# EAGLE board versao 1.0 (EAGLE 5.01)
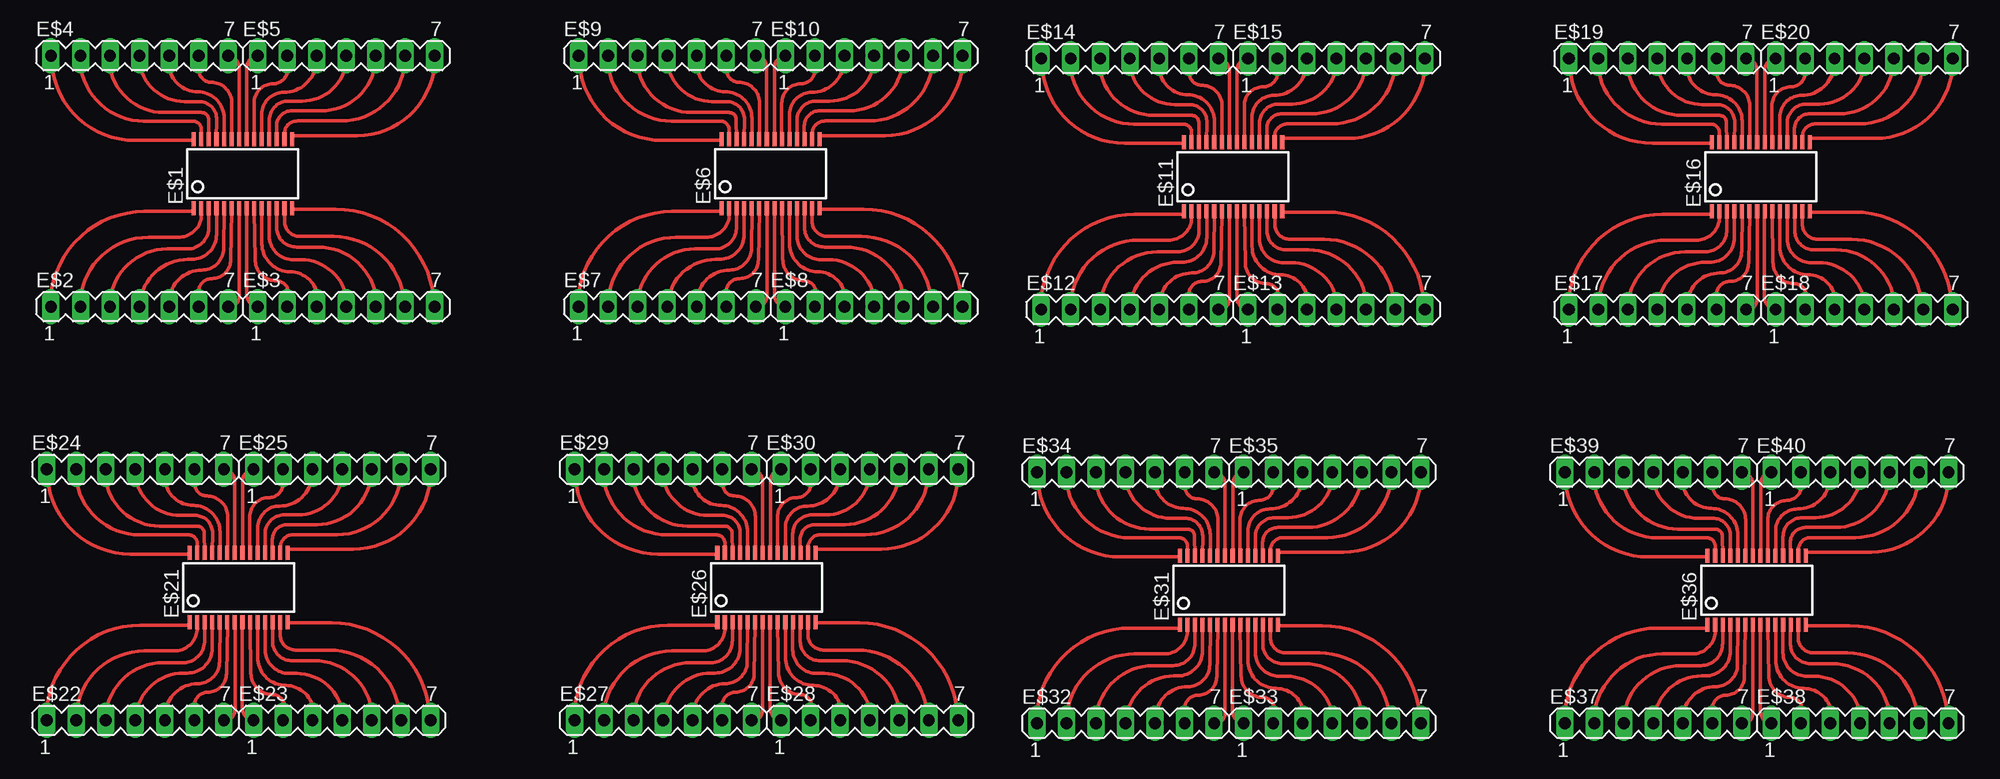
[diagram p0: board, top side]

No outline drawn. Coordinates in mm, seen from the top.
Copper layers (1*16): Top 0.035mm / dielectric 1.5mm / Bottom 0.035mm
Design rules "default": minimum track width 10mil, minimum drill 24mil, track to track 8mil, track to pad 8mil, pad to pad 8mil, via to via 8mil, smd to smd 8mil, copper to edge 40mil, drill to drill 8mil, minimum pad ring 10mil, minimum via ring 8mil, stop-mask expansion 4mil, vias tented up to drill 0mil, thermal gap 10mil

## Footprints (pad centres in the part's own frame; a part is rotated, then mirrored left to right if it is on the bottom)
P-TSSOP28-1 = smd 0.35 x 1.2: 1 -4.225,-2.975; 2 -3.575,-2.975; 3 -2.925,-2.975; 4 -2.275,-2.975; 5 -1.625,-2.975; 6 -0.975,-2.975; 7 -0.325,-2.975; 8 0.325,-2.975; 9 0.975,-2.975; 10 1.625,-2.975; 11 2.275,-2.975; 12 2.925,-2.975; 13 3.575,-2.975; 14 4.225,-2.975; 15 4.225,2.975; 16 3.575,2.975; 17 2.925,2.975; 18 2.275,2.975; 19 1.625,2.975; 20 0.975,2.975; 21 0.325,2.975; 22 -0.325,2.975; 23 -0.975,2.975; 24 -1.625,2.975; 25 -2.275,2.975; 26 -2.925,2.975; 27 -3.575,2.975; 28 -4.225,2.975
MA07-1 = drill 1.016 long: 1 -7.62,0; 2 -5.08,0; 3 -2.54,0; 4 0,0; 5 2.54,0; 6 5.08,0; 7 7.62,0

## Placement (x,y rotation side)
E$1  [P-TSSOP28-1]  62.23,53.34 0 top
E$2  [MA07-1]  53.34,41.91 0 top
E$3  [MA07-1]  71.12,41.91 0 top
E$4  [MA07-1]  53.34,63.5 0 top
E$5  [MA07-1]  71.12,63.5 0 top
E$6  [P-TSSOP28-1]  107.63,53.34 0 top
E$7  [MA07-1]  98.74,41.91 0 top
E$8  [MA07-1]  116.52,41.91 0 top
E$9  [MA07-1]  98.74,63.5 0 top
E$10  [MA07-1]  116.52,63.5 0 top
E$11  [P-TSSOP28-1]  147.42,53.09 0 top
E$12  [MA07-1]  138.53,41.66 0 top
E$13  [MA07-1]  156.31,41.66 0 top
E$14  [MA07-1]  138.53,63.25 0 top
E$15  [MA07-1]  156.31,63.25 0 top
E$16  [P-TSSOP28-1]  192.82,53.09 0 top
E$17  [MA07-1]  183.93,41.66 0 top
E$18  [MA07-1]  201.71,41.66 0 top
E$19  [MA07-1]  183.93,63.25 0 top
E$20  [MA07-1]  201.71,63.25 0 top
E$21  [P-TSSOP28-1]  61.87,17.76 0 top
E$22  [MA07-1]  52.98,6.33 0 top
E$23  [MA07-1]  70.76,6.33 0 top
E$24  [MA07-1]  52.98,27.92 0 top
E$25  [MA07-1]  70.76,27.92 0 top
E$26  [P-TSSOP28-1]  107.27,17.76 0 top
E$27  [MA07-1]  98.38,6.33 0 top
E$28  [MA07-1]  116.16,6.33 0 top
E$29  [MA07-1]  98.38,27.92 0 top
E$30  [MA07-1]  116.16,27.92 0 top
E$31  [P-TSSOP28-1]  147.06,17.51 0 top
E$32  [MA07-1]  138.17,6.08 0 top
E$33  [MA07-1]  155.95,6.08 0 top
E$34  [MA07-1]  138.17,27.67 0 top
E$35  [MA07-1]  155.95,27.67 0 top
E$36  [P-TSSOP28-1]  192.46,17.51 0 top
E$37  [MA07-1]  183.57,6.08 0 top
E$38  [MA07-1]  201.35,6.08 0 top
E$39  [MA07-1]  183.57,27.67 0 top
E$40  [MA07-1]  201.35,27.67 0 top

## Library data of the parts
E$1 E$6 E$11 E$16 E$21 E$26 E$31 E$36 = infineon
E$2-E$5 E$7-E$10 E$12-E$15 E$17-E$20 E$22-E$25 E$27-E$30 E$32-E$35 E$37-E$40 = con-lstb

## Tracks (layer width: path | path; a pad name or v marks a point on that pad's centre or on a via)
S$1
  Top 0.305: 58.01,56.21 52.92,56.21 arc-90 45.76,63.37
S$2
  Top 0.305: 58.63,56.16 58.66,57.16 arc90 57.93,57.86 53.72,57.86 arc-90 48.2,63.38
S$3
  Top 0.305: 59.31,56.31 59.28,57.99 arc90 58.66,58.61 55.44,58.61 arc-90 50.73,63.32
S$4
  Top 0.305: 59.95,56.36 59.98,58.03 arc90 58.47,59.54 57.21,59.54 arc-90 53.29,63.46
S$5
  Top 0.305: 60.62,56.29 60.62,58.11 arc90 58.34,60.39 arc-90 55.85,62.88 55.85,63.48
S$6
  Top 0.305: 61.28,56.33 61.28,59.43 arc90 59.5,61.21 arc-90 58.46,62.25 58.46,63.43
S$7
  Top 0.305: 61.9,56.25 61.9,62.48 arc90 60.9,63.48
S$8
  Top 0.305: 62.57,56.34 62.57,62.52 arc-90 63.5,63.45
S$9
  Top 0.305: 63.19,56.28 63.19,59.42 arc-90 64.81,61.07 arc90 66.07,62.33 66.07,63.45
S$10
  Top 0.305: 63.86,56.11 63.86,58.47 arc-90 65.76,60.34 arc90 68.55,63.13 68.55,63.43
S$11
  Top 0.305: 64.5,56.25 64.5,57.94 arc-90 66.15,59.59 67.32,59.59 arc90 71.18,63.45
S$12
  Top 0.305: 65.13,56.23 65.13,57.49 arc-90 66.43,58.75 68.98,58.75 arc90 73.66,63.43
S$13
  Top 0.305: 65.8,56.2 65.8,56.8 arc-90 66.93,57.88 70.71,57.88 arc90 76.19,63.36
S$14
  Top 0.305: 66.45,56.63 72.08,56.63 arc90 78.76,63.31
S$15
  Top 0.305: 61.91,50.26 61.91,42.81 arc-90 60.94,41.84
S$16
  Top 0.305: 62.55,50.38 62.55,42.97 arc90 63.64,41.88
S$17
  Top 0.305: 61.27,50.15 61.18,45.93 arc-90 59.58,44.33 arc90 58.41,43.16 58.41,41.84
S$18
  Top 0.305: 63.2,50.06 63.28,45.98 arc90 65.13,44.13 arc-90 66.13,43.13 66.13,41.92
S$19
  Top 0.305: 60.62,50.18 60.58,46.95 arc-90 58.69,45.06 arc97 55.91,41.92
S$20
  Top 0.305: 63.87,50.26 63.87,47.34 arc90 66.27,44.91 arc-106 68.59,41.85
S$21
  Top 0.305: 59.96,50.3 59.96,48.11 arc-90 57.83,45.98 57.5,45.98 arc90 53.37,41.85
S$22
  Top 0.305: 64.5,50.13 64.5,47.97 arc90 66.57,45.95 67.2,45.95 arc-90 71.23,41.92
S$23
  Top 0.305: 59.3,50.32 59.3,48.78 arc-90 57.48,46.87 55.72,46.87 arc90 50.77,41.92
S$24
  Top 0.305: 65.14,50.29 65.14,48.68 arc90 66.86,47.04 68.7,47.04 arc-90 73.74,42
S$25
  Top 0.305: 58.69,50.06 58.67,50.04 arc-90 56.84,47.88 54.11,47.88 arc90 48.23,42
S$26
  Top 0.305: 65.81,50.18 65.81,49.25 arc90 67.1,47.96 70.03,47.96 arc-90 76.11,41.88
S$27
  Top 0.305: 58.01,50.1 53.76,50.1 arc90 45.66,42
S$28
  Top 0.305: 66.57,50.3 70.22,50.3 arc-90 78.68,41.84
S$29
  Top 0.305: 103.41,56.21 98.32,56.21 arc-90 91.16,63.37
S$30
  Top 0.305: 104.03,56.16 104.06,57.16 arc90 103.33,57.86 99.12,57.86 arc-90 93.6,63.38
S$31
  Top 0.305: 104.71,56.31 104.68,57.99 arc90 104.06,58.61 100.84,58.61 arc-90 96.13,63.32
S$32
  Top 0.305: 105.35,56.36 105.38,58.03 arc90 103.87,59.54 102.61,59.54 arc-90 98.69,63.46
S$33
  Top 0.305: 106.02,56.29 106.02,58.11 arc90 103.74,60.39 arc-90 101.25,62.88 101.25,63.48
S$34
  Top 0.305: 106.68,56.33 106.68,59.43 arc90 104.9,61.21 arc-90 103.86,62.25 103.86,63.43
S$35
  Top 0.305: 107.3,56.25 107.3,62.48 arc90 106.3,63.48
S$36
  Top 0.305: 107.97,56.34 107.97,62.52 arc-90 108.9,63.45
S$37
  Top 0.305: 108.59,56.28 108.59,59.42 arc-90 110.21,61.07 arc90 111.47,62.33 111.47,63.45
S$38
  Top 0.305: 109.26,56.11 109.26,58.47 arc-90 111.16,60.34 arc90 113.95,63.13 113.95,63.43
S$39
  Top 0.305: 109.9,56.25 109.9,57.94 arc-90 111.55,59.59 112.72,59.59 arc90 116.58,63.45
S$40
  Top 0.305: 110.53,56.23 110.53,57.49 arc-90 111.83,58.75 114.38,58.75 arc90 119.06,63.43
S$41
  Top 0.305: 111.2,56.2 111.2,56.8 arc-90 112.33,57.88 116.11,57.88 arc90 121.59,63.36
S$42
  Top 0.305: 111.85,56.63 117.48,56.63 arc90 124.16,63.31
S$43
  Top 0.305: 107.31,50.26 107.31,42.81 arc-90 106.34,41.84
S$44
  Top 0.305: 107.95,50.38 107.95,42.97 arc90 109.04,41.88
S$45
  Top 0.305: 106.67,50.15 106.58,45.93 arc-90 104.98,44.33 arc90 103.81,43.16 103.81,41.84
S$46
  Top 0.305: 108.6,50.06 108.68,45.98 arc90 110.53,44.13 arc-90 111.53,43.13 111.53,41.92
S$47
  Top 0.305: 106.02,50.18 105.98,46.95 arc-90 104.09,45.06 arc97 101.31,41.92
S$48
  Top 0.305: 109.27,50.26 109.27,47.34 arc90 111.67,44.91 arc-106 113.99,41.85
S$49
  Top 0.305: 105.36,50.3 105.36,48.11 arc-90 103.23,45.98 102.9,45.98 arc90 98.77,41.85
S$50
  Top 0.305: 109.9,50.13 109.9,47.97 arc90 111.97,45.95 112.6,45.95 arc-90 116.63,41.92
S$51
  Top 0.305: 104.7,50.32 104.7,48.78 arc-90 102.88,46.87 101.12,46.87 arc90 96.17,41.92
S$52
  Top 0.305: 110.54,50.29 110.54,48.68 arc90 112.26,47.04 114.1,47.04 arc-90 119.14,42
S$53
  Top 0.305: 104.09,50.06 104.07,50.04 arc-90 102.24,47.88 99.51,47.88 arc90 93.63,42
S$54
  Top 0.305: 111.21,50.18 111.21,49.25 arc90 112.5,47.96 115.43,47.96 arc-90 121.51,41.88
S$55
  Top 0.305: 103.41,50.1 99.16,50.1 arc90 91.06,42
S$56
  Top 0.305: 111.97,50.3 115.62,50.3 arc-90 124.08,41.84
S$57
  Top 0.305: 143.2,55.96 138.11,55.96 arc-90 130.95,63.12
S$58
  Top 0.305: 143.82,55.91 143.85,56.91 arc90 143.12,57.61 138.91,57.61 arc-90 133.39,63.13
S$59
  Top 0.305: 144.5,56.06 144.47,57.74 arc90 143.85,58.36 140.63,58.36 arc-90 135.92,63.07
S$60
  Top 0.305: 145.14,56.11 145.17,57.78 arc90 143.66,59.29 142.4,59.29 arc-90 138.48,63.21
S$61
  Top 0.305: 145.81,56.04 145.81,57.86 arc90 143.53,60.14 arc-90 141.04,62.63 141.04,63.23
S$62
  Top 0.305: 146.47,56.08 146.47,59.18 arc90 144.69,60.96 arc-90 143.65,62 143.65,63.18
S$63
  Top 0.305: 147.09,56 147.09,62.23 arc90 146.09,63.23
S$64
  Top 0.305: 147.76,56.09 147.76,62.27 arc-90 148.69,63.2
S$65
  Top 0.305: 148.38,56.03 148.38,59.17 arc-90 150,60.82 arc90 151.26,62.08 151.26,63.2
S$66
  Top 0.305: 149.05,55.86 149.05,58.22 arc-90 150.95,60.09 arc90 153.74,62.88 153.74,63.18
S$67
  Top 0.305: 149.69,56 149.69,57.69 arc-90 151.34,59.34 152.51,59.34 arc90 156.37,63.2
S$68
  Top 0.305: 150.32,55.98 150.32,57.24 arc-90 151.62,58.5 154.17,58.5 arc90 158.85,63.18
S$69
  Top 0.305: 150.99,55.95 150.99,56.55 arc-90 152.12,57.63 155.9,57.63 arc90 161.38,63.11
S$70
  Top 0.305: 151.64,56.38 157.27,56.38 arc90 163.95,63.06
S$71
  Top 0.305: 147.1,50.01 147.1,42.56 arc-90 146.13,41.59
S$72
  Top 0.305: 147.74,50.13 147.74,42.72 arc90 148.83,41.63
S$73
  Top 0.305: 146.46,49.9 146.37,45.68 arc-90 144.77,44.08 arc90 143.6,42.91 143.6,41.59
S$74
  Top 0.305: 148.39,49.81 148.47,45.73 arc90 150.32,43.88 arc-90 151.32,42.88 151.32,41.67
S$75
  Top 0.305: 145.81,49.93 145.77,46.7 arc-90 143.88,44.81 arc97 141.1,41.67
S$76
  Top 0.305: 149.06,50.01 149.06,47.09 arc90 151.46,44.66 arc-106 153.78,41.6
S$77
  Top 0.305: 145.15,50.05 145.15,47.86 arc-90 143.02,45.73 142.69,45.73 arc90 138.56,41.6
S$78
  Top 0.305: 149.69,49.88 149.69,47.72 arc90 151.76,45.7 152.39,45.7 arc-90 156.42,41.67
S$79
  Top 0.305: 144.49,50.07 144.49,48.53 arc-90 142.67,46.62 140.91,46.62 arc90 135.96,41.67
S$80
  Top 0.305: 150.33,50.04 150.33,48.43 arc90 152.05,46.79 153.89,46.79 arc-90 158.93,41.75
S$81
  Top 0.305: 143.88,49.81 143.86,49.79 arc-90 142.03,47.63 139.3,47.63 arc90 133.42,41.75
S$82
  Top 0.305: 151,49.93 151,49 arc90 152.29,47.71 155.22,47.71 arc-90 161.3,41.63
S$83
  Top 0.305: 143.2,49.85 138.95,49.85 arc90 130.85,41.75
S$84
  Top 0.305: 151.76,50.05 155.41,50.05 arc-90 163.87,41.59
S$85
  Top 0.305: 188.6,55.96 183.51,55.96 arc-90 176.35,63.12
S$86
  Top 0.305: 189.22,55.91 189.25,56.91 arc90 188.52,57.61 184.31,57.61 arc-90 178.79,63.13
S$87
  Top 0.305: 189.9,56.06 189.87,57.74 arc90 189.25,58.36 186.03,58.36 arc-90 181.32,63.07
S$88
  Top 0.305: 190.54,56.11 190.57,57.78 arc90 189.06,59.29 187.8,59.29 arc-90 183.88,63.21
S$89
  Top 0.305: 191.21,56.04 191.21,57.86 arc90 188.93,60.14 arc-90 186.44,62.63 186.44,63.23
S$90
  Top 0.305: 191.87,56.08 191.87,59.18 arc90 190.09,60.96 arc-90 189.05,62 189.05,63.18
S$91
  Top 0.305: 192.49,56 192.49,62.23 arc90 191.49,63.23
S$92
  Top 0.305: 193.16,56.09 193.16,62.27 arc-90 194.09,63.2
S$93
  Top 0.305: 193.78,56.03 193.78,59.17 arc-90 195.4,60.82 arc90 196.66,62.08 196.66,63.2
S$94
  Top 0.305: 194.45,55.86 194.45,58.22 arc-90 196.35,60.09 arc90 199.14,62.88 199.14,63.18
S$95
  Top 0.305: 195.09,56 195.09,57.69 arc-90 196.74,59.34 197.91,59.34 arc90 201.77,63.2
S$96
  Top 0.305: 195.72,55.98 195.72,57.24 arc-90 197.02,58.5 199.57,58.5 arc90 204.25,63.18
S$97
  Top 0.305: 196.39,55.95 196.39,56.55 arc-90 197.52,57.63 201.3,57.63 arc90 206.78,63.11
S$98
  Top 0.305: 197.04,56.38 202.67,56.38 arc90 209.35,63.06
S$99
  Top 0.305: 192.5,50.01 192.5,42.56 arc-90 191.53,41.59
S$100
  Top 0.305: 193.14,50.13 193.14,42.72 arc90 194.23,41.63
S$101
  Top 0.305: 191.86,49.9 191.77,45.68 arc-90 190.17,44.08 arc90 189,42.91 189,41.59
S$102
  Top 0.305: 193.79,49.81 193.87,45.73 arc90 195.72,43.88 arc-90 196.72,42.88 196.72,41.67
S$103
  Top 0.305: 191.21,49.93 191.17,46.7 arc-90 189.28,44.81 arc97 186.5,41.67
S$104
  Top 0.305: 194.46,50.01 194.46,47.09 arc90 196.86,44.66 arc-106 199.18,41.6
S$105
  Top 0.305: 190.55,50.05 190.55,47.86 arc-90 188.42,45.73 188.09,45.73 arc90 183.96,41.6
S$106
  Top 0.305: 195.09,49.88 195.09,47.72 arc90 197.16,45.7 197.79,45.7 arc-90 201.82,41.67
S$107
  Top 0.305: 189.89,50.07 189.89,48.53 arc-90 188.07,46.62 186.31,46.62 arc90 181.36,41.67
S$108
  Top 0.305: 195.73,50.04 195.73,48.43 arc90 197.45,46.79 199.29,46.79 arc-90 204.33,41.75
S$109
  Top 0.305: 189.28,49.81 189.26,49.79 arc-90 187.43,47.63 184.7,47.63 arc90 178.82,41.75
S$110
  Top 0.305: 196.4,49.93 196.4,49 arc90 197.69,47.71 200.62,47.71 arc-90 206.7,41.63
S$111
  Top 0.305: 188.6,49.85 184.35,49.85 arc90 176.25,41.75
S$112
  Top 0.305: 197.16,50.05 200.81,50.05 arc-90 209.27,41.59
S$113
  Top 0.305: 57.65,20.63 52.56,20.63 arc-90 45.4,27.79
S$114
  Top 0.305: 58.27,20.58 58.3,21.58 arc90 57.57,22.28 53.36,22.28 arc-90 47.84,27.8
S$115
  Top 0.305: 58.95,20.73 58.92,22.41 arc90 58.3,23.03 55.08,23.03 arc-90 50.37,27.74
S$116
  Top 0.305: 59.59,20.78 59.62,22.45 arc90 58.11,23.96 56.85,23.96 arc-90 52.93,27.88
S$117
  Top 0.305: 60.26,20.71 60.26,22.53 arc90 57.98,24.81 arc-90 55.49,27.3 55.49,27.9
S$118
  Top 0.305: 60.92,20.75 60.92,23.85 arc90 59.14,25.63 arc-90 58.1,26.67 58.1,27.85
S$119
  Top 0.305: 61.54,20.67 61.54,26.9 arc90 60.54,27.9
S$120
  Top 0.305: 62.21,20.76 62.21,26.94 arc-90 63.14,27.87
S$121
  Top 0.305: 62.83,20.7 62.83,23.84 arc-90 64.45,25.49 arc90 65.71,26.75 65.71,27.87
S$122
  Top 0.305: 63.5,20.53 63.5,22.89 arc-90 65.4,24.76 arc90 68.19,27.55 68.19,27.85
S$123
  Top 0.305: 64.14,20.67 64.14,22.36 arc-90 65.79,24.01 66.96,24.01 arc90 70.82,27.87
S$124
  Top 0.305: 64.77,20.65 64.77,21.91 arc-90 66.07,23.17 68.62,23.17 arc90 73.3,27.85
S$125
  Top 0.305: 65.44,20.62 65.44,21.22 arc-90 66.57,22.3 70.35,22.3 arc90 75.83,27.78
S$126
  Top 0.305: 66.09,21.05 71.72,21.05 arc90 78.4,27.73
S$127
  Top 0.305: 61.55,14.68 61.55,7.23 arc-90 60.58,6.26
S$128
  Top 0.305: 62.19,14.8 62.19,7.39 arc90 63.28,6.3
S$129
  Top 0.305: 60.91,14.57 60.82,10.35 arc-90 59.22,8.75 arc90 58.05,7.58 58.05,6.26
S$130
  Top 0.305: 62.84,14.48 62.92,10.4 arc90 64.77,8.55 arc-90 65.77,7.55 65.77,6.34
S$131
  Top 0.305: 60.26,14.6 60.22,11.37 arc-90 58.33,9.48 arc97 55.55,6.34
S$132
  Top 0.305: 63.51,14.68 63.51,11.76 arc90 65.91,9.33 arc-106 68.23,6.27
S$133
  Top 0.305: 59.6,14.72 59.6,12.53 arc-90 57.47,10.4 57.14,10.4 arc90 53.01,6.27
S$134
  Top 0.305: 64.14,14.55 64.14,12.39 arc90 66.21,10.37 66.84,10.37 arc-90 70.87,6.34
S$135
  Top 0.305: 58.94,14.74 58.94,13.2 arc-90 57.12,11.29 55.36,11.29 arc90 50.41,6.34
S$136
  Top 0.305: 64.78,14.71 64.78,13.1 arc90 66.5,11.46 68.34,11.46 arc-90 73.38,6.42
S$137
  Top 0.305: 58.33,14.48 58.31,14.46 arc-90 56.48,12.3 53.75,12.3 arc90 47.87,6.42
S$138
  Top 0.305: 65.45,14.6 65.45,13.67 arc90 66.74,12.38 69.67,12.38 arc-90 75.75,6.3
S$139
  Top 0.305: 57.65,14.52 53.4,14.52 arc90 45.3,6.42
S$140
  Top 0.305: 66.21,14.72 69.86,14.72 arc-90 78.32,6.26
S$141
  Top 0.305: 103.05,20.63 97.96,20.63 arc-90 90.8,27.79
S$142
  Top 0.305: 103.67,20.58 103.7,21.58 arc90 102.97,22.28 98.76,22.28 arc-90 93.24,27.8
S$143
  Top 0.305: 104.35,20.73 104.32,22.41 arc90 103.7,23.03 100.48,23.03 arc-90 95.77,27.74
S$144
  Top 0.305: 104.99,20.78 105.02,22.45 arc90 103.51,23.96 102.25,23.96 arc-90 98.33,27.88
S$145
  Top 0.305: 105.66,20.71 105.66,22.53 arc90 103.38,24.81 arc-90 100.89,27.3 100.89,27.9
S$146
  Top 0.305: 106.32,20.75 106.32,23.85 arc90 104.54,25.63 arc-90 103.5,26.67 103.5,27.85
S$147
  Top 0.305: 106.94,20.67 106.94,26.9 arc90 105.94,27.9
S$148
  Top 0.305: 107.61,20.76 107.61,26.94 arc-90 108.54,27.87
S$149
  Top 0.305: 108.23,20.7 108.23,23.84 arc-90 109.85,25.49 arc90 111.11,26.75 111.11,27.87
S$150
  Top 0.305: 108.9,20.53 108.9,22.89 arc-90 110.8,24.76 arc90 113.59,27.55 113.59,27.85
S$151
  Top 0.305: 109.54,20.67 109.54,22.36 arc-90 111.19,24.01 112.36,24.01 arc90 116.22,27.87
S$152
  Top 0.305: 110.17,20.65 110.17,21.91 arc-90 111.47,23.17 114.02,23.17 arc90 118.7,27.85
S$153
  Top 0.305: 110.84,20.62 110.84,21.22 arc-90 111.97,22.3 115.75,22.3 arc90 121.23,27.78
S$154
  Top 0.305: 111.49,21.05 117.12,21.05 arc90 123.8,27.73
S$155
  Top 0.305: 106.95,14.68 106.95,7.23 arc-90 105.98,6.26
S$156
  Top 0.305: 107.59,14.8 107.59,7.39 arc90 108.68,6.3
S$157
  Top 0.305: 106.31,14.57 106.22,10.35 arc-90 104.62,8.75 arc90 103.45,7.58 103.45,6.26
S$158
  Top 0.305: 108.24,14.48 108.32,10.4 arc90 110.17,8.55 arc-90 111.17,7.55 111.17,6.34
S$159
  Top 0.305: 105.66,14.6 105.62,11.37 arc-90 103.73,9.48 arc97 100.95,6.34
S$160
  Top 0.305: 108.91,14.68 108.91,11.76 arc90 111.31,9.33 arc-106 113.63,6.27
S$161
  Top 0.305: 105,14.72 105,12.53 arc-90 102.87,10.4 102.54,10.4 arc90 98.41,6.27
S$162
  Top 0.305: 109.54,14.55 109.54,12.39 arc90 111.61,10.37 112.24,10.37 arc-90 116.27,6.34
S$163
  Top 0.305: 104.34,14.74 104.34,13.2 arc-90 102.52,11.29 100.76,11.29 arc90 95.81,6.34
S$164
  Top 0.305: 110.18,14.71 110.18,13.1 arc90 111.9,11.46 113.74,11.46 arc-90 118.78,6.42
S$165
  Top 0.305: 103.73,14.48 103.71,14.46 arc-90 101.88,12.3 99.15,12.3 arc90 93.27,6.42
S$166
  Top 0.305: 110.85,14.6 110.85,13.67 arc90 112.14,12.38 115.07,12.38 arc-90 121.15,6.3
S$167
  Top 0.305: 103.05,14.52 98.8,14.52 arc90 90.7,6.42
S$168
  Top 0.305: 111.61,14.72 115.26,14.72 arc-90 123.72,6.26
S$169
  Top 0.305: 142.84,20.38 137.75,20.38 arc-90 130.59,27.54
S$170
  Top 0.305: 143.46,20.33 143.49,21.33 arc90 142.76,22.03 138.55,22.03 arc-90 133.03,27.55
S$171
  Top 0.305: 144.14,20.48 144.11,22.16 arc90 143.49,22.78 140.27,22.78 arc-90 135.56,27.49
S$172
  Top 0.305: 144.78,20.53 144.81,22.2 arc90 143.3,23.71 142.04,23.71 arc-90 138.12,27.63
S$173
  Top 0.305: 145.45,20.46 145.45,22.28 arc90 143.17,24.56 arc-90 140.68,27.05 140.68,27.65
S$174
  Top 0.305: 146.11,20.5 146.11,23.6 arc90 144.33,25.38 arc-90 143.29,26.42 143.29,27.6
S$175
  Top 0.305: 146.73,20.42 146.73,26.65 arc90 145.73,27.65
S$176
  Top 0.305: 147.4,20.51 147.4,26.69 arc-90 148.33,27.62
S$177
  Top 0.305: 148.02,20.45 148.02,23.59 arc-90 149.64,25.24 arc90 150.9,26.5 150.9,27.62
S$178
  Top 0.305: 148.69,20.28 148.69,22.64 arc-90 150.59,24.51 arc90 153.38,27.3 153.38,27.6
S$179
  Top 0.305: 149.33,20.42 149.33,22.11 arc-90 150.98,23.76 152.15,23.76 arc90 156.01,27.62
S$180
  Top 0.305: 149.96,20.4 149.96,21.66 arc-90 151.26,22.92 153.81,22.92 arc90 158.49,27.6
S$181
  Top 0.305: 150.63,20.37 150.63,20.97 arc-90 151.76,22.05 155.54,22.05 arc90 161.02,27.53
S$182
  Top 0.305: 151.28,20.8 156.91,20.8 arc90 163.59,27.48
S$183
  Top 0.305: 146.74,14.43 146.74,6.98 arc-90 145.77,6.01
S$184
  Top 0.305: 147.38,14.55 147.38,7.14 arc90 148.47,6.05
S$185
  Top 0.305: 146.1,14.32 146.01,10.1 arc-90 144.41,8.5 arc90 143.24,7.33 143.24,6.01
S$186
  Top 0.305: 148.03,14.23 148.11,10.15 arc90 149.96,8.3 arc-90 150.96,7.3 150.96,6.09
S$187
  Top 0.305: 145.45,14.35 145.41,11.12 arc-90 143.52,9.23 arc97 140.74,6.09
S$188
  Top 0.305: 148.7,14.43 148.7,11.51 arc90 151.1,9.08 arc-106 153.42,6.02
S$189
  Top 0.305: 144.79,14.47 144.79,12.28 arc-90 142.66,10.15 142.33,10.15 arc90 138.2,6.02
S$190
  Top 0.305: 149.33,14.3 149.33,12.14 arc90 151.4,10.12 152.03,10.12 arc-90 156.06,6.09
S$191
  Top 0.305: 144.13,14.49 144.13,12.95 arc-90 142.31,11.04 140.55,11.04 arc90 135.6,6.09
S$192
  Top 0.305: 149.97,14.46 149.97,12.85 arc90 151.69,11.21 153.53,11.21 arc-90 158.57,6.17
S$193
  Top 0.305: 143.52,14.23 143.5,14.21 arc-90 141.67,12.05 138.94,12.05 arc90 133.06,6.17
S$194
  Top 0.305: 150.64,14.35 150.64,13.42 arc90 151.93,12.13 154.86,12.13 arc-90 160.94,6.05
S$195
  Top 0.305: 142.84,14.27 138.59,14.27 arc90 130.49,6.17
S$196
  Top 0.305: 151.4,14.47 155.05,14.47 arc-90 163.51,6.01
S$197
  Top 0.305: 188.24,20.38 183.15,20.38 arc-90 175.99,27.54
S$198
  Top 0.305: 188.86,20.33 188.89,21.33 arc90 188.16,22.03 183.95,22.03 arc-90 178.43,27.55
S$199
  Top 0.305: 189.54,20.48 189.51,22.16 arc90 188.89,22.78 185.67,22.78 arc-90 180.96,27.49
S$200
  Top 0.305: 190.18,20.53 190.21,22.2 arc90 188.7,23.71 187.44,23.71 arc-90 183.52,27.63
S$201
  Top 0.305: 190.85,20.46 190.85,22.28 arc90 188.57,24.56 arc-90 186.08,27.05 186.08,27.65
S$202
  Top 0.305: 191.51,20.5 191.51,23.6 arc90 189.73,25.38 arc-90 188.69,26.42 188.69,27.6
S$203
  Top 0.305: 192.13,20.42 192.13,26.65 arc90 191.13,27.65
S$204
  Top 0.305: 192.8,20.51 192.8,26.69 arc-90 193.73,27.62
S$205
  Top 0.305: 193.42,20.45 193.42,23.59 arc-90 195.04,25.24 arc90 196.3,26.5 196.3,27.62
S$206
  Top 0.305: 194.09,20.28 194.09,22.64 arc-90 195.99,24.51 arc90 198.78,27.3 198.78,27.6
S$207
  Top 0.305: 194.73,20.42 194.73,22.11 arc-90 196.38,23.76 197.55,23.76 arc90 201.41,27.62
S$208
  Top 0.305: 195.36,20.4 195.36,21.66 arc-90 196.66,22.92 199.21,22.92 arc90 203.89,27.6
S$209
  Top 0.305: 196.03,20.37 196.03,20.97 arc-90 197.16,22.05 200.94,22.05 arc90 206.42,27.53
S$210
  Top 0.305: 196.68,20.8 202.31,20.8 arc90 208.99,27.48
S$211
  Top 0.305: 192.14,14.43 192.14,6.98 arc-90 191.17,6.01
S$212
  Top 0.305: 192.78,14.55 192.78,7.14 arc90 193.87,6.05
S$213
  Top 0.305: 191.5,14.32 191.41,10.1 arc-90 189.81,8.5 arc90 188.64,7.33 188.64,6.01
S$214
  Top 0.305: 193.43,14.23 193.51,10.15 arc90 195.36,8.3 arc-90 196.36,7.3 196.36,6.09
S$215
  Top 0.305: 190.85,14.35 190.81,11.12 arc-90 188.92,9.23 arc97 186.14,6.09
S$216
  Top 0.305: 194.1,14.43 194.1,11.51 arc90 196.5,9.08 arc-106 198.82,6.02
S$217
  Top 0.305: 190.19,14.47 190.19,12.28 arc-90 188.06,10.15 187.73,10.15 arc90 183.6,6.02
S$218
  Top 0.305: 194.73,14.3 194.73,12.14 arc90 196.8,10.12 197.43,10.12 arc-90 201.46,6.09
S$219
  Top 0.305: 189.53,14.49 189.53,12.95 arc-90 187.71,11.04 185.95,11.04 arc90 181,6.09
S$220
  Top 0.305: 195.37,14.46 195.37,12.85 arc90 197.09,11.21 198.93,11.21 arc-90 203.97,6.17
S$221
  Top 0.305: 188.92,14.23 188.9,14.21 arc-90 187.07,12.05 184.34,12.05 arc90 178.46,6.17
S$222
  Top 0.305: 196.04,14.35 196.04,13.42 arc90 197.33,12.13 200.26,12.13 arc-90 206.34,6.05
S$223
  Top 0.305: 188.24,14.27 183.99,14.27 arc90 175.89,6.17
S$224
  Top 0.305: 196.8,14.47 200.45,14.47 arc-90 208.91,6.01